# Altium PCB PCB1.PcbDoc
Units mm, origin at the board's own origin, x right, y up, seen from the top; angles counter-clockwise.
Board outline 35.18 x 37.85 mm, 2 copper layers (Top Layer, Bottom Layer); 17 components, 14 nets, 73 pads, 0 vias.
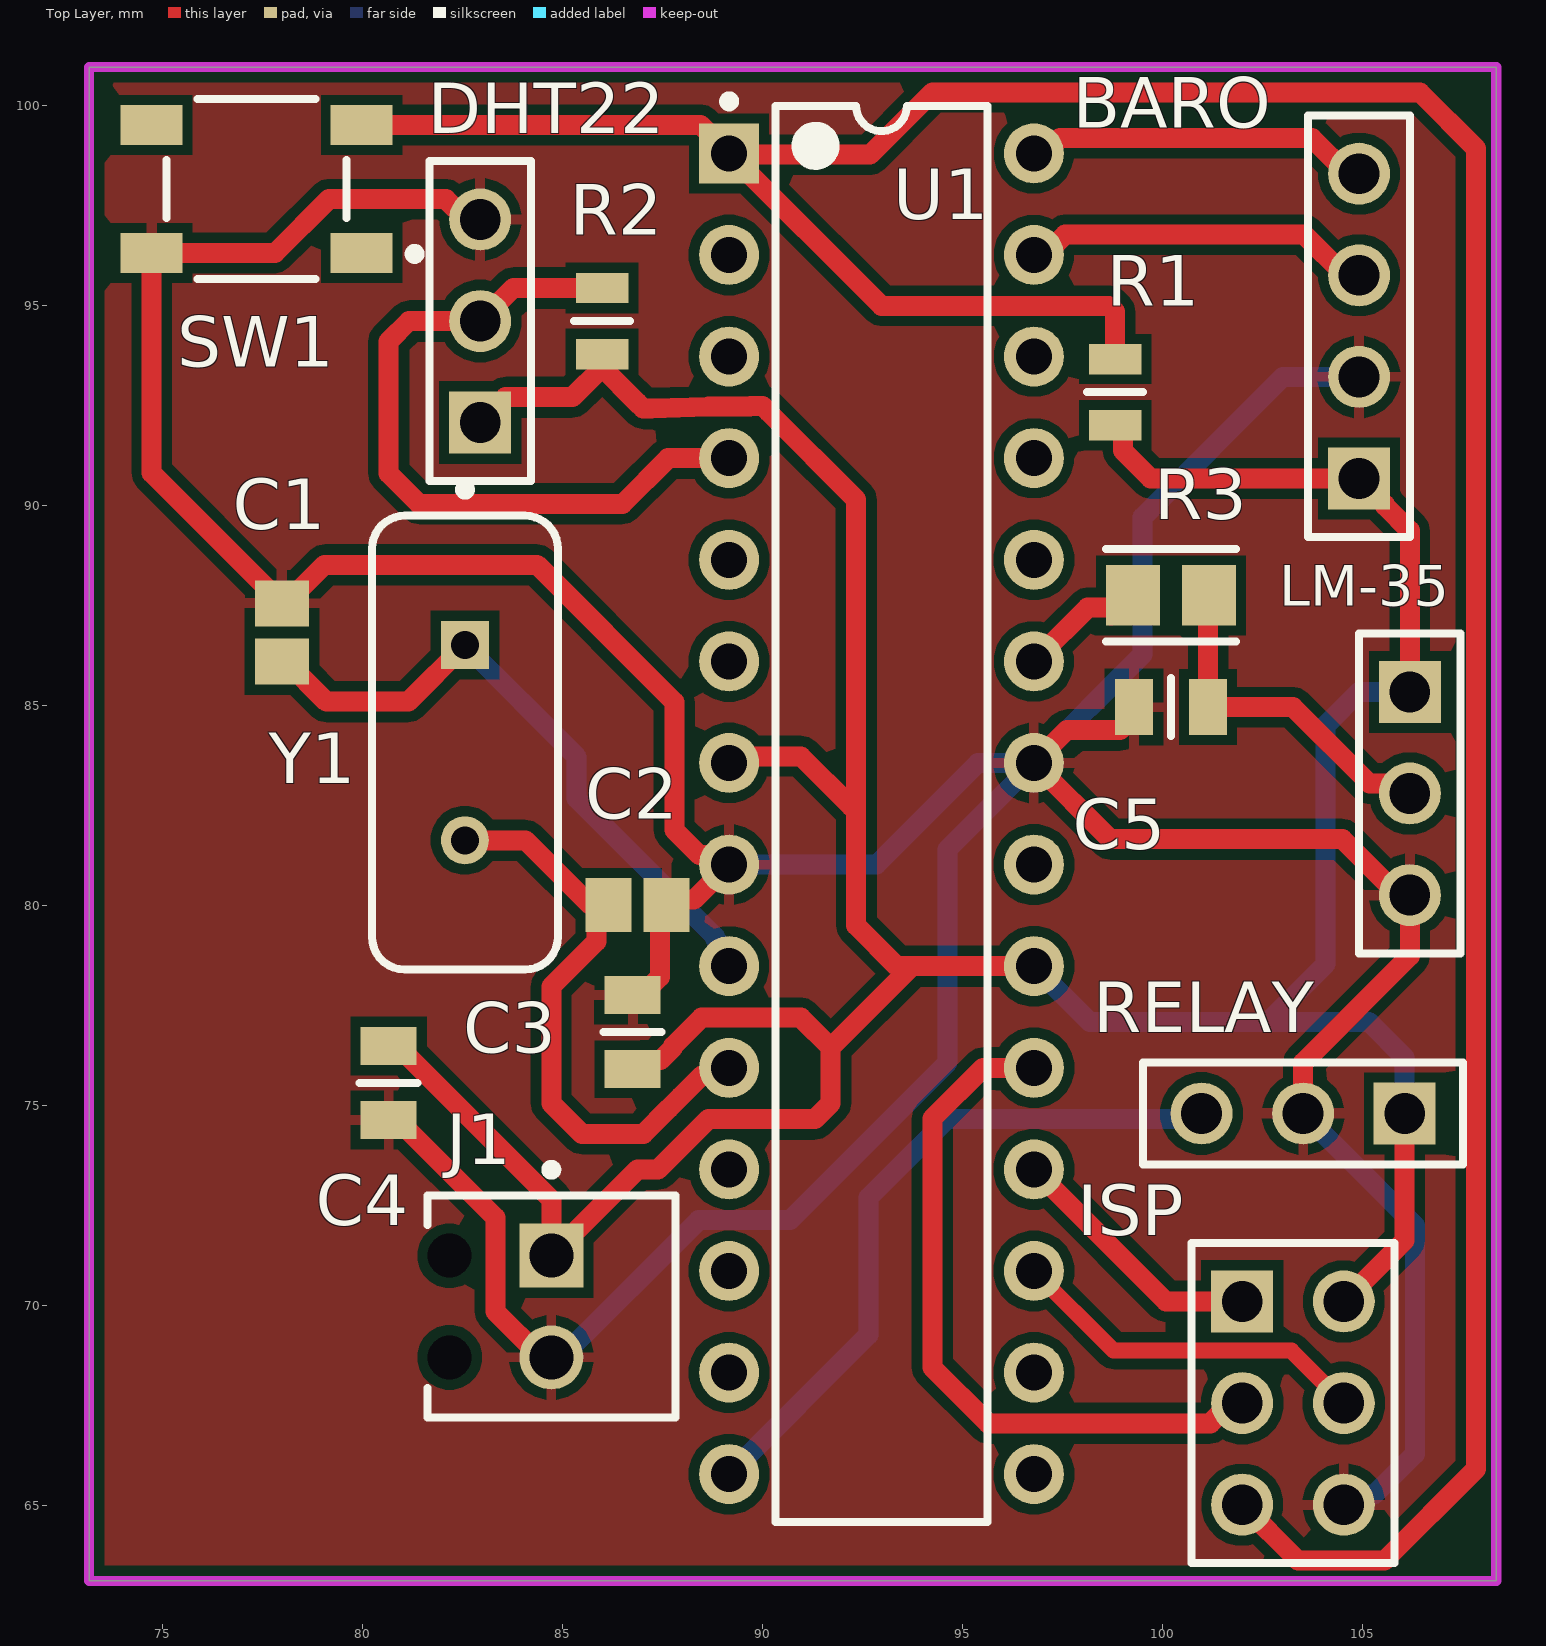
[diagram p0: Top Layer view]
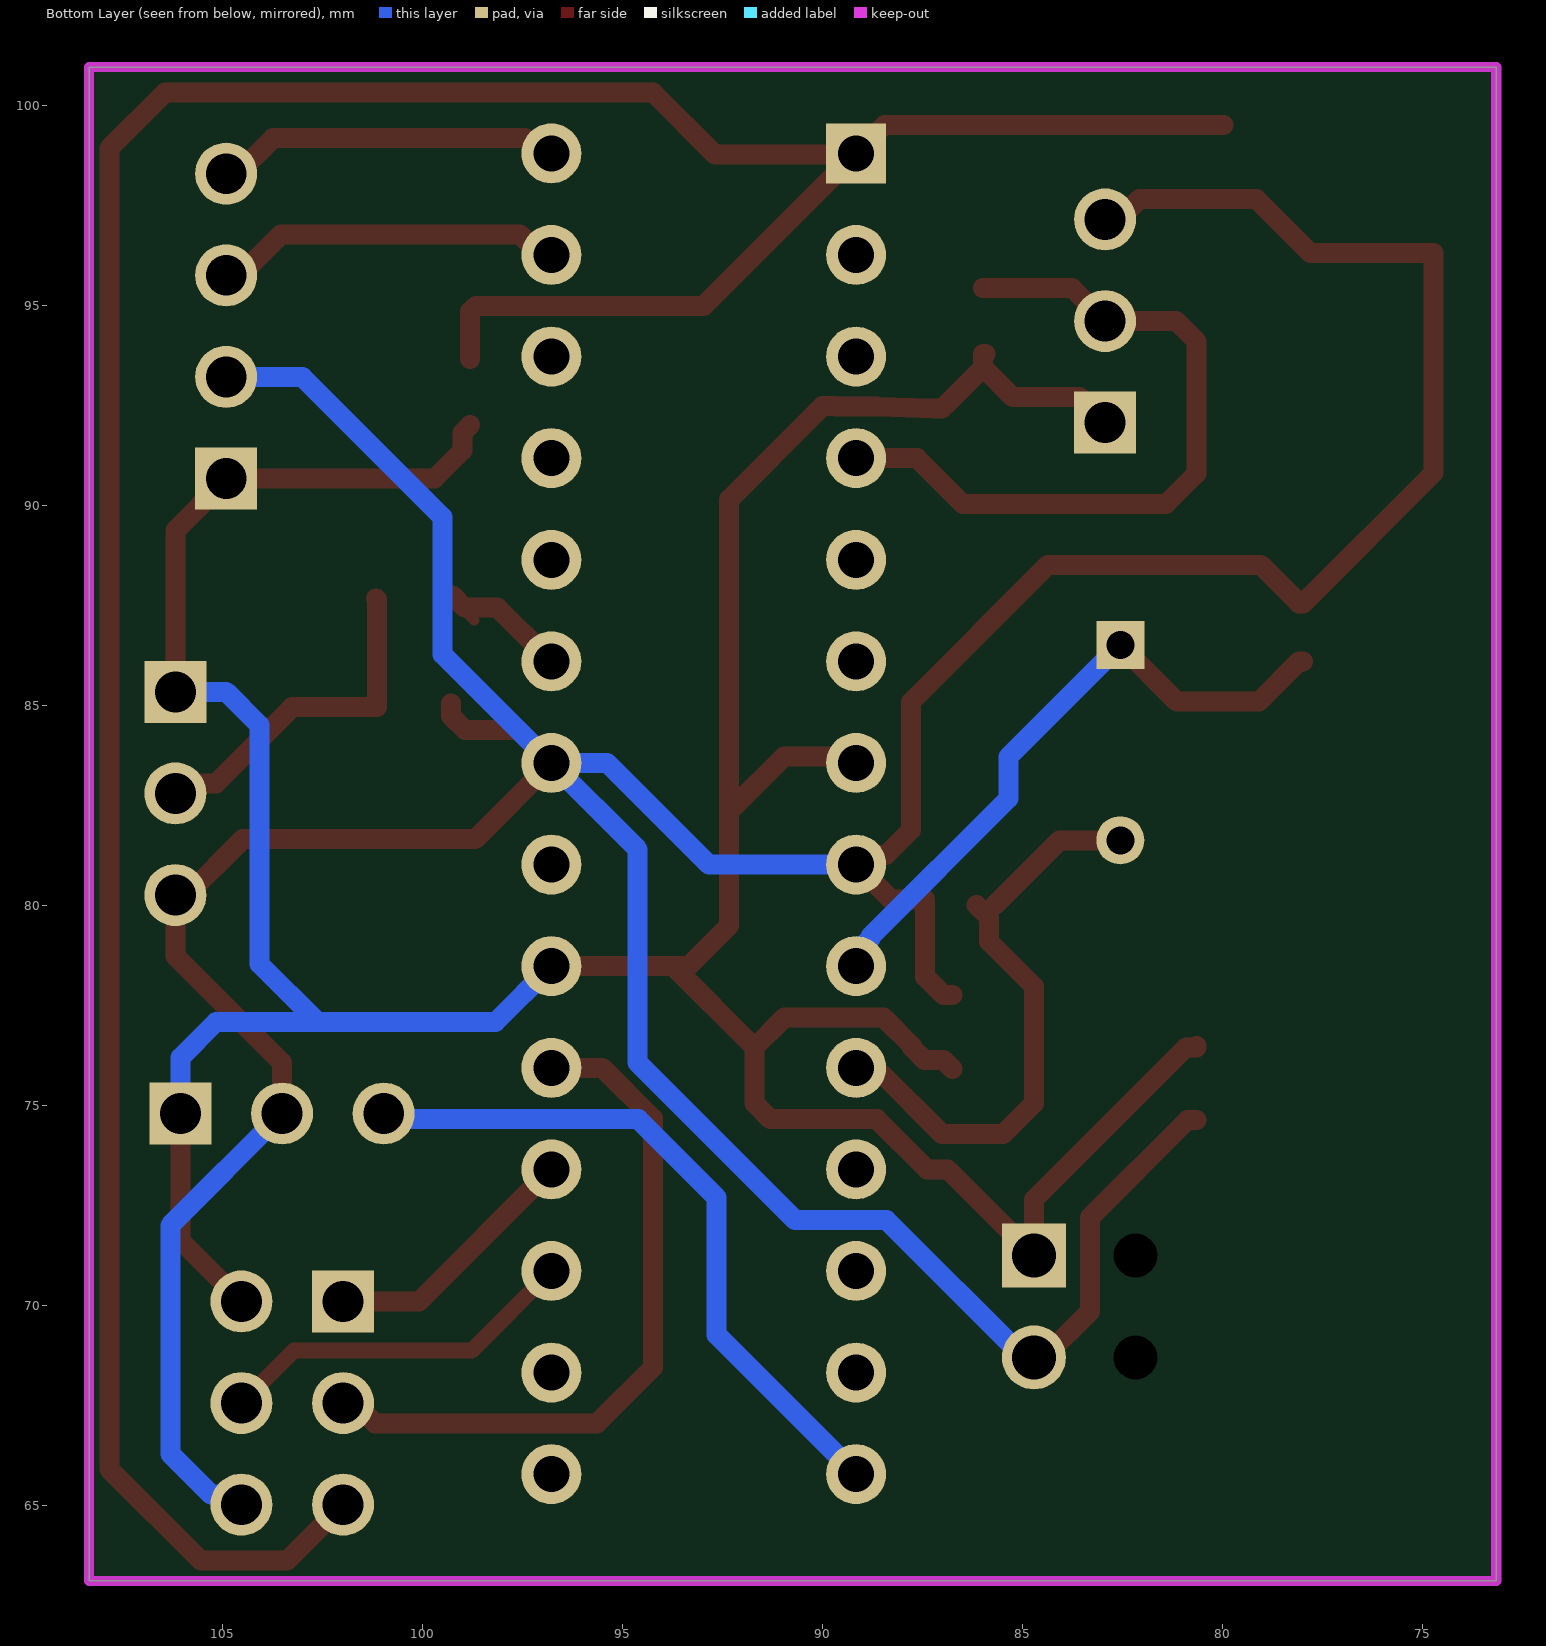
[diagram p1: Bottom Layer view, seen from below]
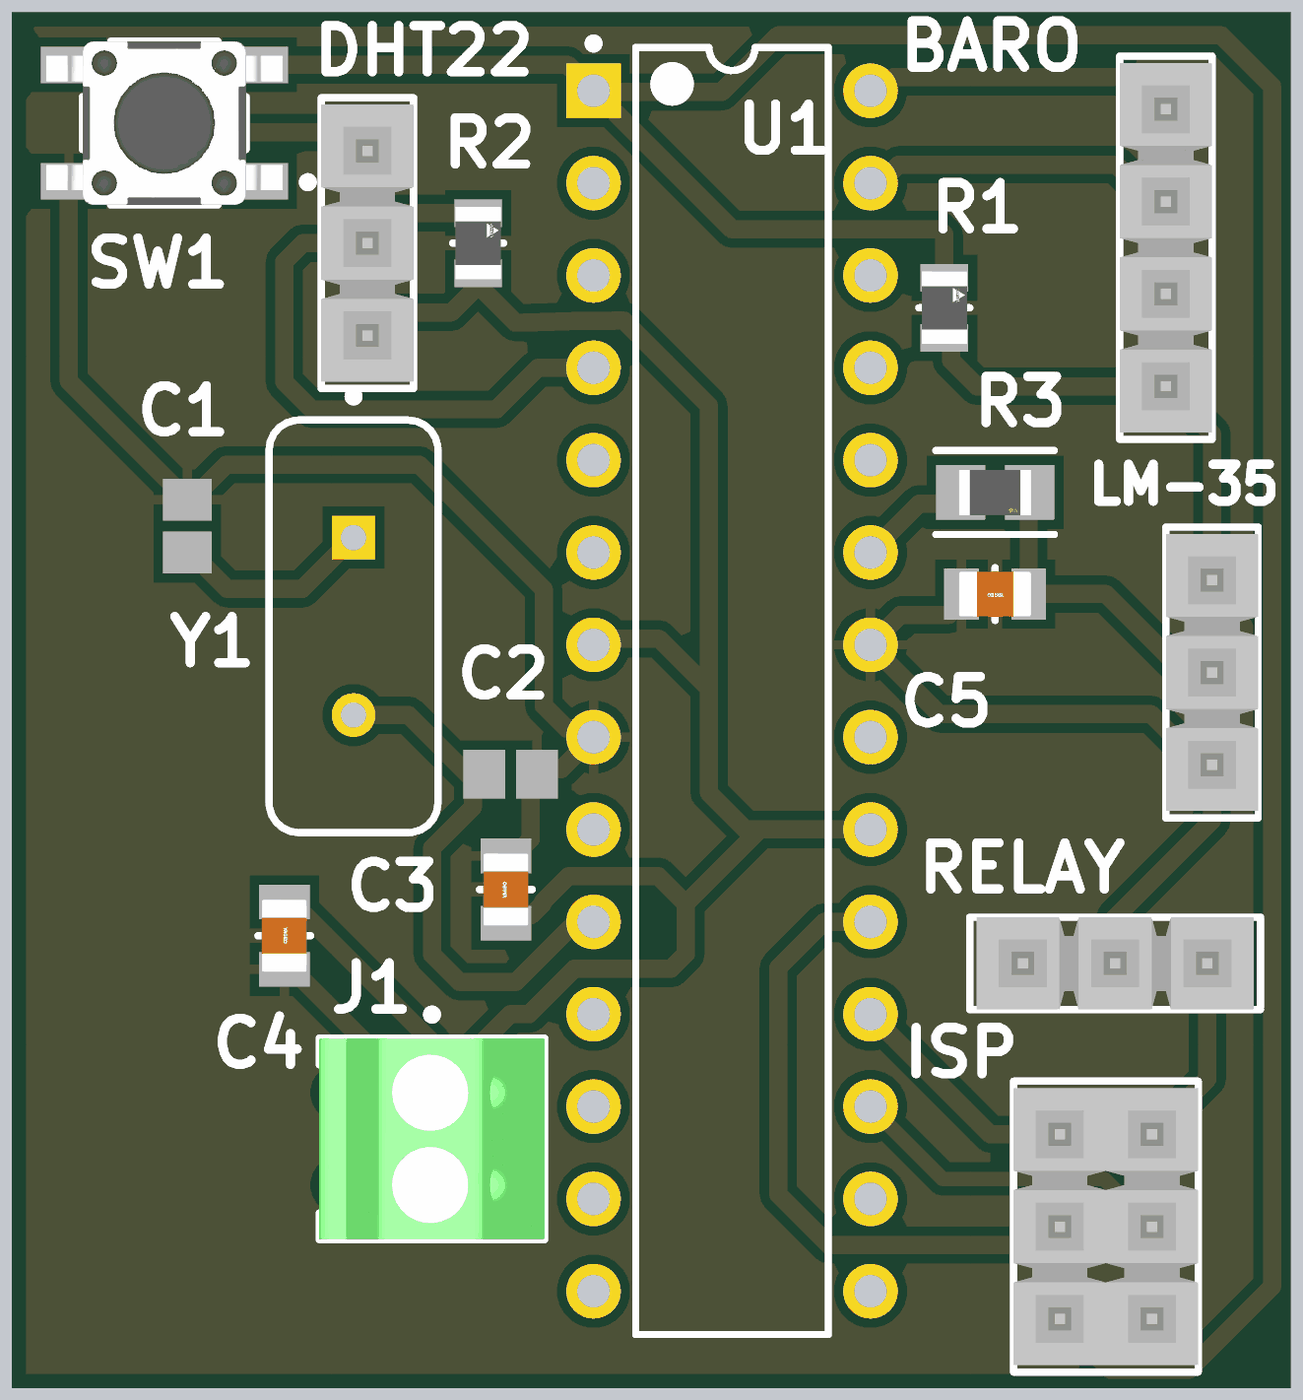
[diagram p2: 3D render of the assembled board from above, using the file's embedded part models]

## Layer stack, top to bottom
Top Solder: solder mask 0.0102, Solder Resist, Dk 3.5
Top Layer: signal copper 0.0356
Dielectric 1: dielectric 0.32, FR-4, Dk 4.8
Bottom Layer: signal copper 0.0356
Bottom Solder: solder mask 0.0102, Solder Resist, Dk 3.5

## Board outline
73.152,63.119 73.152,100.965 108.331,100.965 108.331,63.119

## Design rules (kind name [scope] priority, off if disabled: settings)
Clearance [All] p1: gap=0.254 ignorepadtopadclearanceinfootprint=FALSE
PolygonConnect [All] p1: connectstyle=Relief reliefconductorwidth=0.254 reliefentries=4 polygonreliefangle="90 Angle" airgapwidth=0.254
RoutingVias [All] p1: holewidth=0.711 width=1.27 viastyle="Through Hole" minholewidth=0.711 minwidth=1.27 maxholewidth=0.711 maxwidth=1.27
SolderMaskExpansion [All] p1: expansion=0 istentingtop=FALSE
SupplyNets "Schematic Supply Nets" [InNet('GND')] p1: voltage=0.000
Width [All] p1: maxlimit=0.5 minlimit=0.254 preferedwidth=0.254 minimp=50.000000 maximp=50.000000 favimp=50.000000
30 further rules are at their usual default settings.

## Classes and differential pairs
component class "vacuum chamber PCB1": BARO C1 C2 C3 C4 C5 DHT22 J1 R1 R2 R3 SW1 U1 Y1

## Components (designator, comment, footprint, x,y, rotation, side; value= is the part's Value field where it differs from the comment)
BARO "MTSW-104-07-G-S-170" SMTC-MTSW-104-07-X-S-170 104.902,90.678 r90 top
C1 "08051A220KAT2A" CAPC2013X94X50LL20T25 77.978,86.831 r90 top
C2 "08051A220KAT2A" CAPC2013X94X50LL20T25 86.868,80.01 r0 top
C3 "100nf" FP-CC0805-EB-MFG 86.741,76.835 r90 top
C4 "100nf" FP-CC0805-EB-MFG 80.645,75.565 r270 top
C5 "100nf" FP-CC0805-EB-MFG 100.203,84.963 r180 top
DHT22 "TSW-103-07-G-S" SMTC-TSW-103-07-X-S 82.931,92.075 r90 top
ISP "TSW-103-08-T-D" SMTC-TSW-103-08-X-D 101.981,70.104 r270 top (schematic designator P1)
J1 "1725656" PHOE-1725656-2 84.709,69.977 r270 top
LM-35 "TSW-103-07-T-S" SMTC-TSW-103-07-X-S 106.172,85.344 r270 top (schematic designator P5)
R1 "10k" FP-MCU0805-IPC_C 98.806,92.837 r90 top
R2 "10k" FP-MCU0805-IPC_C 85.979,94.615 r90 top
R3 "1k" FP-TFCR0805-IPC_A 100.203,87.757 r180 top
RELAY "TSW-103-07-T-S" SMTC-TSW-103-07-X-S 106.045,74.803 r180 top (schematic designator P4)
SW1 "PTS647SK38SMTR2LFS" FP-PTS647SK38SMTR2LFS-MFG 77.343,97.917 r180 top
U1 "ATmega328P-PU" 28P3 92.964,82.296 r0 top
Y1 "FOXSLF/160-20" FOX-FOXSLF160-20 82.55,84.074 r270 top

## Footprints (in the part's own frame and the unit in brackets; to place one, negate y for a bottom-side part, rotate by r counter-clockwise, add the part's x,y. Pads: shape width x height; smd on the part's side, far side on the other; paste and mask are expansions set on the pad)
28P3 [mm] "28-Pin Plastic Dual In-Line Package (PDIP)"
  rect 1.5x1.5 hole 0.9: 1(-3.81,16.51)
  round 1.5 hole 0.9: 2(-3.81,13.97) 3(-3.81,11.43) 4(-3.81,8.89) 5(-3.81,6.35) 6(-3.81,3.81) 7(-3.81,1.27) 8(-3.81,-1.27) 9(-3.81,-3.81) 10(-3.81,-6.35) 11(-3.81,-8.89) 12(-3.81,-11.43) 13(-3.81,-13.97) 14(-3.81,-16.51) 15(3.81,-16.51) 16(3.81,-13.97) 17(3.81,-11.43) 18(3.81,-8.89) 19(3.81,-6.35) 20(3.81,-3.81) 21(3.81,-1.27) 22(3.81,1.27) 23(3.81,3.81) 24(3.81,6.35) 25(3.81,8.89) 26(3.81,11.43) 27(3.81,13.97) 28(3.81,16.51)
  silkscreen extent -3.93,-17.7 2.65,17.93, body extent -3.6,-17.65 3.6,17.65, height 4.58
CAPC2013X94X50LL20T25 [mm] "Chip Capacitor, 2-Leads, Body 2.01x1.25mm, IPC High Density"
  rect 1.15x1.35 smd: 1(-0.725,0) 2(0.725,0)
  body extent -1.1,-0.72 1.1,0.72, height 0.94
FOX-FOXSLF160-20 [mm] "THD, 2-Leads, Body 11.35x4.65mm"
  rect 1.2x1.2 hole 0.7: 1(-2.44,0)
  round 1.2 hole 0.7: 2(2.44,0)
  silkscreen extent -6.45,-2.33 5.68,2.33, body extent -5.67,-2.32 5.68,2.33, height 3.6
FP-CC0805-EB-MFG [mm]
  rect 0.95x1.4 smd paste+0 mask+0: 1(-0.925,0) 2(0.925,0)
  silkscreen extent 0,-0.72 0,0.72, body extent -1.6,-1.05 1.6,1.05, height 0.25
FP-MCU0805-IPC_C [mm]
  rect 0.759x1.308 smd paste+0 mask+0: 1(-0.827,0) 2(0.827,0)
  silkscreen extent 0,-0.7 0,0.7, body extent -1.31,-0.8 1.31,0.8, height 0.25
FP-PTS647SK38SMTR2LFS-MFG [mm]
  rect 1.55x1 smd paste+0 mask+0: 1(-2.625,1.6) 2(2.625,1.6) 3(-2.625,-1.6) 4(2.625,-1.6)
  silkscreen extent -4.08,-2.25 2.25,2.25, body extent -3.5,-2.35 3.5,2.35, height 0.25
FP-TFCR0805-IPC_A [mm]
  rect 1.356x1.508 smd paste+0 mask+0: 1(-0.951,0) 2(0.951,0)
  silkscreen extent -1.63,-1.15 1.63,1.15, body extent -2.13,-1.25 2.13,1.25, height 0.25
PHOE-1725656-2 [mm] "Connector, 2-Leads, Body 6.2x5.4mm, Pitch 2.54mm"
  rect 1.6x1.6 hole 1.1: 1(-1.27,0)
  round 1.6 hole 1.1: 2(1.27,0)
  round 0 hole 1.1 unplated: MH1(-1.27,-2.54) MH2(1.27,-2.54)
  silkscreen extent -3.54,-3.1 2.77,3.1, body extent -2.77,-3.1 2.77,3.1, height 9
SMTC-MTSW-104-07-X-S-170 [mm] "Assembly .025\" [.64] SQ Post Terminal Strip, 1x4 Pins, Vertical, 2.54mm Pitch, Male"
  rect 1.55x1.55 hole 1.02: 1(0,0)
  round 1.55 hole 1.02: 2(2.54,0) 3(5.08,0) 4(7.62,0)
  silkscreen extent -1.46,-1.27 9.08,1.27, body extent -1.27,-1.27 8.89,1.27, height 6.86
SMTC-TSW-103-07-X-S [mm] ".025 SQ Post Terminal Strip Assembly, 1x3 Pins, Vertical, 2.54mm Pitch, Male"
  rect 1.55x1.55 hole 1.02: 1(0,0)
  round 1.55 hole 1.02: 2(2.54,0) 3(5.08,0)
  silkscreen extent -1.46,-1.27 6.54,1.27, body extent -1.27,-1.27 6.35,1.27, height 8.38
SMTC-TSW-103-08-X-D [mm] ".025 SQ Post Terminal Strip Assembly, 2x3 Pins, Vertical, 2.54mm Pitch, Male"
  rect 1.55x1.55 hole 1.02: 1(0,0)
  round 1.55 hole 1.02: 2(0,2.54) 3(2.54,0) 4(2.54,2.54) 5(5.08,0) 6(5.08,2.54)
  silkscreen extent -1.46,-1.27 6.54,3.81, body extent -1.27,-1.27 6.35,3.81, height 8.38

## Part data
BARO: library part CMP-1024-00104-1, "Modified .025\" SQ Post Header, Through-hole, Vertical, -55 to 125 degC, 2.54 mm Pitch, 4-Pin, Male, RoHS", Manufacturer=Samtec, Temperature Range="-55 to 125 degC", ComponentLink1Description="Manufacturer URL", ComponentLink1URL=http://www.samtec.com, ComponentLink2Description=Datasheet, ComponentLink2URL=http://www.samtec.com/documents/webfiles/pdf/MTSW.PDF, ComponentLink3Description="Package Specification", ComponentLink3URL=http://www.samtec.com/documents/webfiles/cpdf/MTSW-XXX-XX-X-X-XXXX-XX-XXX-MKT1.pdf, DatasheetVersion=F-214, Mounting Technology=Through-hole, Orientation=Vertical, PackageDescription="Assembly .025\" [.64] SQ Post Terminal Strip", PackageReference=MTSW-104-07-X-S-170, PackageVersion="BI, 2/1987", PartNumber=MTSW-104-07-G-S-170, Pitch="2.54 mm", RoHS=True
C1 C2: library part CMP-2007-04137-1, Manufacturer="AVX Interconnect / Elco", Part Number=08051A220KAT2A
C3 C4 C5: library part CMP-00621-107850848-1, "CC0805KKX7RYBB104 Capacitor Ceramic 0.01uF 250V X7R 10% 0805 T/R", Capacitance=100nF, Case/Package=0805, Max Operating Temperature=125°C, Min Operating Temperature=-55°C, Tolerance=10%, Voltage Rating=250V, Height=1.45mm, Material=Ceramic, NexarPartId=107850848
DHT22: library part CMP-1024-00333-1, "0.025\" SQ Post Header, Through-hole, Vertical, -55 to 125 degC, 2.54 mm Pitch, 3-Pin, Male, RoHS", Manufacturer=Samtec, Temperature Range="-55 to 125 degC", ComponentLink1Description="Manufacturer URL", ComponentLink1URL=http://www.samtec.com, ComponentLink2Description=Datasheet, ComponentLink2URL=http://www.samtec.com/documents/webfiles/pdf/TSW_TH.PDF, ComponentLink3Description="Package Specification", ComponentLink3URL=http://www.samtec.com/documents/webfiles/cpdf/TSW-XXX-XX-XXX-X-XX-XXX-MKT.pdf, DatasheetVersion=F-214, Mounting Technology=Through-hole, Orientation=Vertical, PackageDescription=".025[0.64] SQ. Post Terminal Strip Assembly", PackageReference=TSW-103-07-X-S, PackageVersion="DM, 8/1988", PartNumber=TSW-103-07-G-S, Pitch="2.54 mm", RoHS=True
ISP: library part CMP-1024-00335-1, "0.025\" SQ Post Header, Through-hole, Vertical, -55 to 105 degC, 2.54 mm Pitch, 6-Pin, Male, RoHS", Manufacturer=Samtec, Temperature Range="-55 to 105 degC", ComponentLink1Description="Manufacturer URL", ComponentLink1URL=http://www.samtec.com, ComponentLink2Description=Datasheet, ComponentLink2URL=http://www.samtec.com/documents/webfiles/pdf/TSW_TH.PDF, ComponentLink3Description="Package Specification", ComponentLink3URL=http://www.samtec.com/documents/webfiles/cpdf/TSW-XXX-XX-XXX-X-XX-XXX-MKT.pdf, DatasheetVersion=F-214, Mounting Technology=Through-hole, Orientation=Vertical, PackageDescription=".025[0.64] SQ. Post Terminal Strip Assembly", PackageReference=TSW-103-08-X-D, PackageVersion="DM, 8/1988", PartNumber=TSW-103-08-T-D, Pitch="2.54 mm", RoHS=True
J1: library part CMP-2000-05299-1, "Male Header, Pitch 2.54 mm, 1 x 2 Position, Height 9 mm, Tail Length 3.5 mm", Colour=Green, Manufacturer="Phoenix Contact", Content=250pc(s), Datasheet URL=http://datasheet.octopart.com/1725656-Phoenix-Contact-datasheet-5302866.pdf, Datasheet Version=Apr-08, Industrial packaging=Yes, Manufacturer part No.=1725656, Manufacturer URL=http://www.phoenixcontact.com/, Number of contacts=2, Pitch=2.54mm, Type=MPT0,5/2-2,54
LM-35 RELAY: library part CMP-1024-00332-1, "0.025\" SQ Post Header, Through-hole, Vertical, -55 to 105 degC, 2.54 mm Pitch, 3-Pin, Male, RoHS", Manufacturer=Samtec, Temperature Range="-55 to 105 degC", ComponentLink1Description="Manufacturer URL", ComponentLink1URL=http://www.samtec.com, ComponentLink2Description=Datasheet, ComponentLink2URL=http://www.samtec.com/documents/webfiles/pdf/TSW_TH.PDF, ComponentLink3Description="Package Specification", ComponentLink3URL=http://www.samtec.com/documents/webfiles/cpdf/TSW-XXX-XX-XXX-X-XX-XXX-MKT.pdf, DatasheetVersion=F-214, Mounting Technology=Through-hole, Orientation=Vertical, PackageDescription=".025[0.64] SQ. Post Terminal Strip Assembly", PackageReference=TSW-103-07-X-S, PackageVersion="DM, 8/1988", PartNumber=TSW-103-07-T-S, Pitch="2.54 mm", RoHS=True
R1 R2: library part CMP-02407-001247-1, "RES 1.05K OHM 0.5% 1/5W 0805"
R3: library part CMP-250906-148809-1, "RES Thin Film,  1kΩ, 0.1%, 0.1W, 25ppm/°C, 0805"
SW1: library part CMP-10040-000033-1, "TACT 4.5 X 4.5, 3.8 MM H, 2.5N,", Max Operating Temperature=70°C, Min Operating Temperature=-20°C, Operating Force=250gf, Ratings=IP40, Actuator Type=Standard, Illumination Type=Non-Illuminated, Mechanical Life=100000Cycles, Mount="Surface Mount", Packaging="Tape and Reel", Switch Function=Off-Mom, Switch Travel=0.25mm, Termination="Gull Wing", Throw Configuration=SPST
U1: library part CMP-0095-00013-2, "8-bit AVR Microcontroller, 32KB Flash, 1KB EEPROM, 2KB SRAM, 28-pin PDIP, Industrial Grade (-40°C to 85°C)", ComponentLink1Description="Manufacturer URL", ComponentLink1URL=http://www.atmel.com/, ComponentLink2Description="ATmega48A/48PA/88A/88PA/168A/168PA/328/328P Datasheet", ComponentLink2URL=http://www.atmel.com/dyn/resources/prod_documents/8271.pdf, ComponentLink3Description="ATmega48A/48PA/88A/88PA/168A/168PA/328/328P Summary", ComponentLink3URL=http://www.atmel.com/dyn/resources/prod_documents/8271S.pdf, DatasheetVersion="revD, May-2011", PackageDescription="28-lead (0.300\"/7.62mm Wide) Plastic Dual Inline Package (PDIP)", PackageReference=28P3, PackageVersion="revB, Sep-2001", RevisionNote="DatasheetVersion updated. URLs added."
Y1: library part CMP-1749-00003-1, "Resistance Weld Thru-Hole Crystal, 16 MHz, -20 to 70 degC, 2-Pin THD, RoHS, Bulk", Case\Package=Axial, Max Operating Temperature="155 degC", Min Operating Temperature="-55 degC", Package Quantity=200, Power Rating="250 mW", Resistance="221 kohm", Tolerance=1%, Voltage Rating="250 V", ComponentLink1Description="Manufacturer URL", ComponentLink1URL=http://www.foxonline.com/, ComponentLink2Description=Datasheet, ComponentLink2URL=http://www.foxonline.com/pdfs/hc49slf.pdf, DatasheetVersion=Mar-15, Length="0.248 inch", Mount="Through Hole", PackageDescription="2-Pin Through Hole Device, Body 11.35 x 4.65 mm", PackageReference=FOXSLF160-20, Packaging=Bulk, RoHSCompliant=true

## Nets (pads, with @x,y where several pads share a name; then routed paths per layer and width w, separated by ;. In a path a pad name is that pad's centre, name@x,y a point inside that pad or via, vN(x,y) a via of type N, cw(c..) or ccw(c..) an arc to the next point about the centre after c; other vN are vias at no path point)
GND: BARO.2 C1.2 C2.2 C3.2 C4.2 C5.2 DHT22.3 ISP.6 J1.2 LM-35.3 RELAY.2 SW1.2 U1.8 U1.22 | length 125.4
  Top Layer w0.5: C4.2 80.87,74.64 83.312,72.198 83.312,69.85 84.455,68.707 J1.2 ; DHT22.3 82.58,97.155 82.072,97.663 79.146,97.663 77.8,96.317 SW1.2 74.718,90.816 C1.2 78.078,87.556 79.041,88.519 84.354,88.519 87.783,85.09 87.783,81.889 88.408,81.264 88.916,81.264 U1.8 88.277,80.149 87.426,80.149 87.426,78.22 86.966,77.76 C3.2 ; C5.2@99.278,85.054 99.278,84.738 98.93,84.39 97.598,84.39 U1.22 98.679,81.661 104.486,81.661 105.883,80.264 LM-35.3 106.172,78.74 103.505,76.073 RELAY.2 ; BARO.2@104.719,93.218 BARO.2
  Bottom Layer w0.5: J1.2 84.963,68.707 88.392,72.136 90.678,72.136 94.615,76.073 94.615,81.407 U1.22 ; U1.8 92.837,81.026 95.377,83.566 U1.22 ; RELAY.2 106.299,72.009 106.299,66.294 105.277,65.272 104.769,65.272 ISP.6 ; BARO.2 102.997,93.218 99.492,89.713 99.492,86.284 U1.22
NetBARO_1: BARO.1 C3.1 C4.1 DHT22.1 ISP.2 J1.1 LM-35.1 R1.1 R2.1 RELAY.1 U1.7 U1.20 | length 97
  Top Layer w0.5: C4.1 80.645,76.454 80.906,76.454 84.709,72.651 J1.1 86.868,73.406 87.381,73.406 88.635,74.66 91.297,74.66 91.694,75.057 91.694,76.454 ; DHT22.1 83.566,92.71 85.235,92.71 R2.1@85.979,93.454 ; R2.1 85.917,93.788 85.979,93.726 R2.1@85.979,93.454 ; C3.1 86.966,76.135 87.438,76.135 87.757,76.454 87.757,76.492 88.465,77.2 90.948,77.2 91.694,76.454 ; U1.7 89.319,83.731 90.953,83.731 92.202,82.481 92.329,82.354 ; U1.20 93.726,78.486 ; R1.1 98.995,91.821 98.995,91.378 99.695,90.678 BARO.1 ; ISP.2 106.045,71.628 RELAY.1 ; BARO.1@104.92,90.66 105.55,90.03 105.55,89.994 106.172,89.372 LM-35.1 ; R2.1@85.979,93.454 86.858,92.575 87.005,92.428 87.22,92.428 88.635,92.472 89.673,92.472 89.686,92.485 89.785,92.485 89.992,92.485 90.138,92.338 92.329,90.147 92.329,82.354 ; 91.694,76.454 93.726,78.486 ; 92.329,82.354 92.329,79.502 93.345,78.486 93.726,78.486
  Bottom Layer w0.5: U1.20 98.171,77.089 102.616,77.089 ; RELAY.1 106.045,76.2 105.156,77.089 102.616,77.089 ; LM-35.1 104.902,85.344 104.07,84.512 104.07,78.543 102.616,77.089
NetBARO_3: BARO.3 U1.27 | length 8.8
  Top Layer w0.5: U1.27 97.045,96.266 97.553,96.774 103.535,96.774 104.551,95.758 BARO.3
NetBARO_4: BARO.4 U1.28 | length 8.7
  Top Layer w0.5: U1.28 97.045,98.806 97.426,99.187 103.729,99.187 104.618,98.298 BARO.4
NetC1_1: C1.1 U1.9 Y1.1 | length 17
  Top Layer w0.5: C1.1 78.078,86.106 79.084,85.1 81.136,85.1 Y1.1 ; U1.9 89.281,78.359 89.281,78.613 U1.9@89.408,78.486
  Bottom Layer w0.5: Y1.1 85.344,83.72 85.344,82.677 88.799,79.222 88.799,79.178 89.154,78.823 U1.9
NetC2_1: C2.1 U1.10 Y1.2 | length 14.8
  Top Layer w0.5: Y1.2 82.65,81.634 82.677,81.661 82.704,81.634 84.063,81.634 C2.1@85.687,80.01 ; C2.1 85.834,79.701 85.834,79.103 84.709,77.978 84.709,75.057 85.471,74.295 87.012,74.295 87.648,74.931 87.65,74.931 87.945,75.226 87.945,75.228 88.471,75.755 88.963,75.755 U1.10
NetC5_1: C5.1 LM-35.2 R3.1 | length 8.7
  Top Layer w0.5: R3.1@101.154,87.681 101.128,87.655 C5.1 103.251,84.963 105.162,83.052 105.924,83.052 LM-35.2
NetDHT22_2: DHT22.2 R2.2 U1.4 | length 18.7
  Top Layer w0.5: R2.2 83.758,95.442 DHT22.2 82.931,94.488 82.804,94.615 81.153,94.615 80.645,94.107 80.645,90.805 81.407,90.043 86.487,90.043 87.63,91.186 U1.4
NetP1_1: ISP.1 U1.18 | length 6.6
  Top Layer w0.5: U1.18 100.076,70.104 ISP.1
NetP1_3: ISP.3 U1.19 | length 17.8
  Top Layer w0.5: U1.19 95.504,75.946 94.234,74.676 94.234,68.453 95.631,67.056 101.184,67.056 101.692,67.564 ISP.3
NetP1_4: ISP.4 U1.17 | length 9.1
  Top Layer w0.4: U1.17 98.765,68.875 103.21,68.875 ISP.4
NetP1_5: ISP.5 R1.2 SW1.3 U1.1 | length 82.2
  Top Layer w0.5: SW1.3 88.443,99.517 U1.1 U1.1@89.185,98.775 ; R1.2 98.806,94.847 98.657,94.996 92.964,94.996 U1.1@89.185,98.775 ; ISP.5 103.378,63.627 105.537,63.627 107.823,65.913 107.823,98.933 106.426,100.33 94.234,100.33 92.679,98.775 U1.1@89.185,98.775
NetP4_3: RELAY.3 U1.14 | length 17.6
  Bottom Layer w0.5: U1.14 92.639,69.271 92.639,72.7 94.599,74.66 100.822,74.66 RELAY.3
NetR3_2: R3.2 U1.23 | length 4.1
  Top Layer w0.254: U1.23 96.901,86.106 U1.23@96.901,86.233 ; R3.2@98.701,87.13 99.252,87.681 R3.2
  Top Layer w0.5: U1.23@96.901,86.233 98.117,87.449 98.944,87.449 R3.2
pads on no net: J1.MH1 J1.MH2 SW1.1 SW1.4 U1.2 U1.3 U1.5 U1.6 U1.11 U1.12 U1.13 U1.15 U1.16 U1.21 U1.24 U1.25 U1.26

## Polygon pours and split planes (outlines as drawn)
GND on Top Layer "GND_L01_P000" (solid, pour order 0): 73.152,63.119 108.331,63.119 108.331,100.965 73.152,100.965

## Keep-outs
Keep-Out Layer:
  the board outline again, w0.254